# EAGLE board LCD-Backpack-PIC18F24J50-HD44780-v1a (EAGLE 5.06)
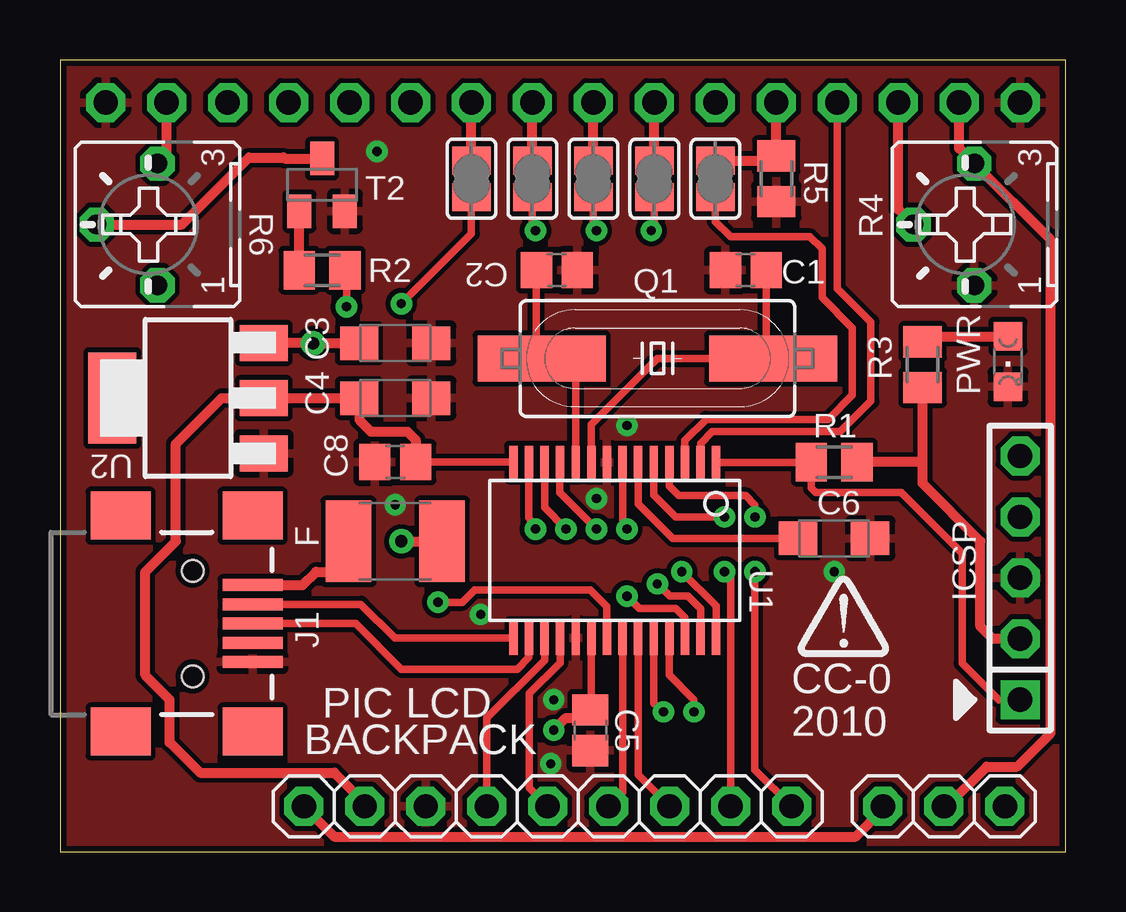
[diagram p0: board, top side]
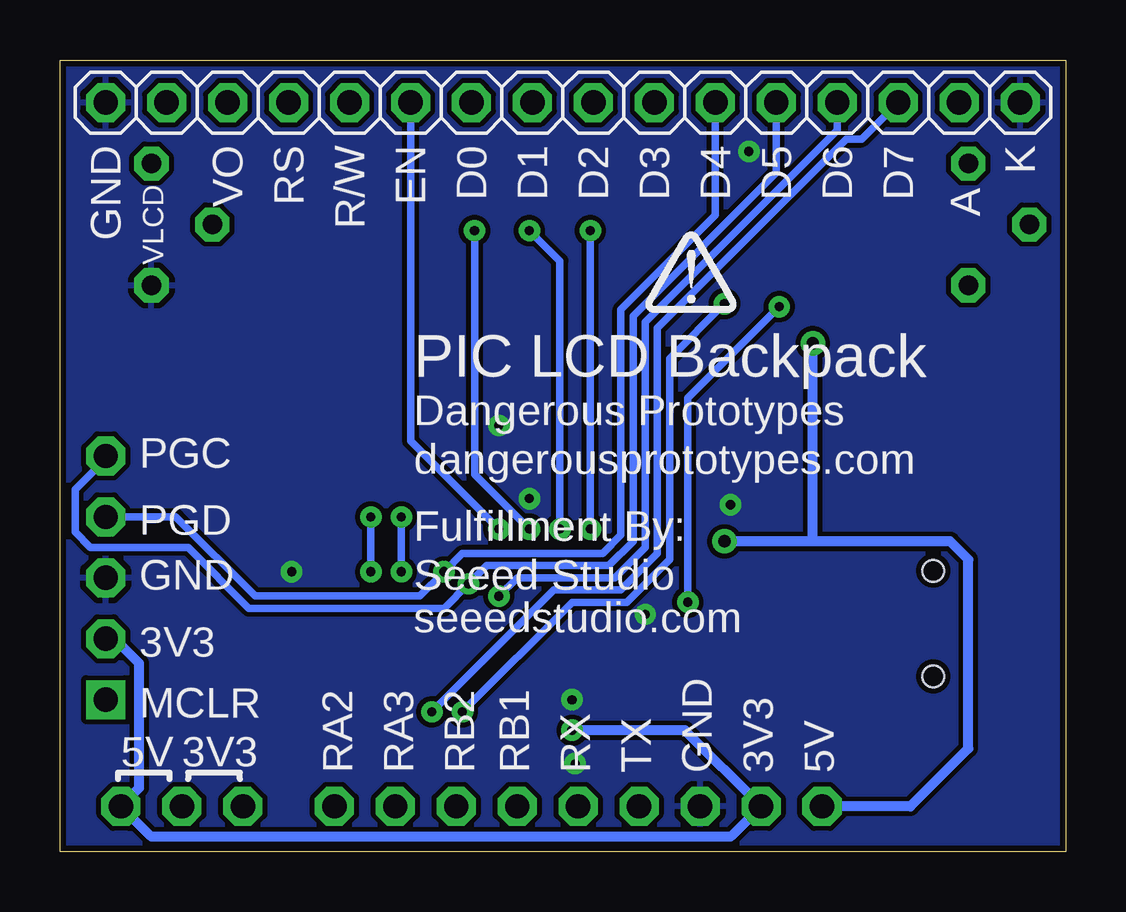
[diagram p1: board, bottom side, seen from below]

Size 41.91 x 33.02 mm. Coordinates in mm from the lower left corner, seen from the top.
Outline: 41.91,33.02 0,33.02 0,0 41.91,0 41.91,33.02
Copper layers (1*16): Top 0.035mm / dielectric 1.5mm / Bottom 0.035mm
Design rules "SparkFun *": minimum track width 8mil, minimum drill 15mil, track to track 8mil, track to pad 8mil, pad to pad 8mil, via to via 8mil, smd to smd 8mil, copper to edge 10mil, drill to drill 8mil, minimum pad ring 12mil, minimum via ring 10mil, stop-mask expansion 4mil, vias tented up to drill 25mil, thermal gap 10mil

## Footprints (pad centres in the part's own frame; a part is rotated, then mirrored left to right if it is on the bottom)
C0805 = smd 1.3 x 1.5: 1 -0.85,0; 2 0.85,0
SMC_A = smd 1.6 x 1.4: + -1.5,0; - 1.5,0
RCL_L1812 = smd 1.9 x 3.4: 1 -1.95,0; 2 1.95,0
1X05 = drill 1.016 square: 1 -5.08,0 | drill 1.016 octagon: 2 -2.54,0; 3 0,0; 4 2.54,0; 5 5.08,0
USB-MINIB = smd 2.5 x 0.5: D+ 2.5,0; D- 2.5,0.8; GND 2.5,-1.6; ID 2.5,-0.8; VBUS 2.5,1.6 | smd 2.5 x 2: GND@1 -3,-4.5; GND@2 -3,4.5; GND@3 2.5,4.5; GND@4 2.5,-4.5 | hole 0.9: 0,2.2; 0,-2.2
1X09 = drill 1.016 octagon: 1 -10.16,0; 2 -7.62,0; 3 -5.08,0; 4 -2.54,0; 5 0,0; 6 2.54,0; 7 5.08,0; 8 7.62,0; 9 10.16,0
1X16 = drill 1.016 octagon: 1 -19.05,0; 2 -16.51,0; 3 -13.97,0; 4 -11.43,0; 5 -8.89,0; 6 -6.35,0; 7 -3.81,0; 8 -1.27,0; 9 1.27,0; 10 3.81,0; 11 6.35,0; 12 8.89,0; 13 11.43,0; 14 13.97,0; 15 16.51,0; 16 19.05,0
LED-805 = smd 1.2 x 1.2: A 0,-1.05; C 0,1.05
HC49UP = smd 5.334 x 1.93: 1 -4.826,0; 2 4.826,0
M0805 = smd 1.3 x 1.6: 1 -0.95,0; 2 0.95,0
B25P = drill 0.813 octagon: A -2.54,0; E 2.54,0; S 0,2.54
1X03 = drill 1.016 octagon: 1 -2.54,0; 2 0,0; 3 2.54,0
SJ = smd 1.168 x 1.6: 1 -0.762,0; 2 0.762,0
SOT23-BEC = smd 1 x 1.4: B -0.95,-1.1; C 0,1.1; E 0.95,-1.1
SSOP28 = smd 0.348 x 1.397: 1 -4.225,-3.656; 2 -3.575,-3.656; 3 -2.925,-3.656; 4 -2.275,-3.656; 5 -1.625,-3.656; 6 -0.975,-3.656; 7 -0.325,-3.656; 8 0.325,-3.656; 9 0.975,-3.656; 10 1.625,-3.656; 11 2.275,-3.656; 12 2.925,-3.656; 13 3.575,-3.656; 14 4.225,-3.656; 15 4.225,3.656; 16 3.575,3.656; 17 2.925,3.656; 18 2.275,3.656; 19 1.625,3.656; 20 0.975,3.656; 21 0.325,3.656; 22 -0.325,3.656; 23 -0.975,3.656; 24 -1.625,3.656; 25 -2.275,3.656; 26 -2.925,3.656; 27 -3.575,3.656; 28 -4.225,3.656
SOT223 = smd 1.5 x 2: 1 -2.3,-3.15; 2 0,-3.15; 3 2.3,-3.15 | smd 3.8 x 2: 4 0,3.15
LCD-16X2 = drill 1.016 square: 1 -32,15.5 | drill 1.016 round: 2 -29.46,15.5; 3 -26.92,15.5; 4 -24.38,15.5; 5 -21.84,15.5; 6 -19.3,15.5; 7 -16.76,15.5; 8 -14.22,15.5; 9 -11.68,15.5; 10 -9.14,15.5; 11 -6.6,15.5; 12 -4.06,15.5; 13 -1.52,15.5; 14 1.02,15.5; 15 3.56,15.5; 16 6.1,15.5 | hole 2.8: -37.5,15.5; -37.5,-15.5; 37.5,15.5; 37.5,-15.5

## Placement (x,y rotation side)
C1  27pf  [C0805]  28.57,24.26 180 top
C2  27pf  [C0805]  20.7,24.26 0 top
C3  10uF  [SMC_A]  13.97,21.21 0 top
C4  1uF  [SMC_A]  13.97,18.92 0 top
C5  0.1uF  [C0805]  22.1,5.08 270 top
C6  10uF  [SMC_A]  32.26,13.08 0 top
C8  0.1uF  [C0805]  13.97,16.26 180 top
F  500mA  [RCL_L1812]  13.97,12.95 180 top
ICSP  [1X05]  40.01,11.43 90 top
J1  USBSMD  [USB-MINIB]  5.52,9.53 0 top
JP1  [1X09]  20.32,1.91 0 top
LCD  [1X16]  20.95,31.24 0 bottom
PWR  [LED-805]  39.5,20.45 180 top
Q1  [HC49UP]  24.89,20.57 180 top
R1  10K  [M0805]  32.26,16.26 0 top
R2  1K  [M0805]  10.92,24.26 0 top
R3  470  [M0805]  35.94,20.32 270 top
R4  [B25P]  38.1,26.16 90 top
R5  10K  [M0805]  29.84,28.07 270 top
R6  [B25P]  4.06,26.16 90 top
SEL  [1X03]  36.83,1.91 0 top
SJ1  [SJ]  27.3,28.07 90 top
SJ2  [SJ]  24.77,28.07 90 top
SJ3  [SJ]  22.23,28.07 90 top
SJ4  [SJ]  19.68,28.07 90 top
SJ5  [SJ]  17.14,28.07 90 top
T2  [SOT23-BEC]  10.92,27.81 0 top
U1  PIC18F24J50  [SSOP28]  23.11,12.57 180 top
U2  [SOT223]  5.33,18.92 90 top
U$1  [DP_LOGO]  32.64,8.76 0 top
U$2  [DP_LOGO]  15.62,23.11 0 bottom
U$3  LCD-16X2  [LCD-16X2]  86.74,16.26 0 top  (outside the outline)

## Library data of the parts
C1 C2 C5 C8 R1 R3 R5 = resistor
C3 C4 PWR T2 U2 U$1 U$2 = dp_devices
C6 R2 = rcl
F = arduino_Uno_ref
ICSP = pinhead-2
J1 U$3 = SparkFun
JP1 SEL = pinhead - Copy
LCD = pinhead
Q1 = crystal
R4 R6 = pot
SJ1-SJ5 = jumper
U1 = dp_devices; PIC18FJ2X50: PIC18FJ2X50

## Nets
3V3: C4.+ C5.1 C8.1 ICSP.2 JP1.2 R1.2 R3.2 SEL.3 U1.14 U1.20 U2.2
A: U$3.15
BASE: R2.1 T2.B
BL+: LCD.15 R6.E
GND: C1.2 C2.2 C3.- C4.- C5.2 C6.- C8.2 ICSP.3 J1.GND JP1.3 LCD.1 LCD.16 PWR.C R4.A R5.2 T2.E U1.8 U1.19 U2.1
K: U$3.16
MCLR: ICSP.1 R1.1 U1.1
N$1: LCD.7 SJ2.2
N$2: LCD.8 SJ3.2
N$3: LCD.9 SJ4.2
N$4: C2.1 Q1.2 U1.10
N$5: C1.1 Q1.1 U1.9
N$6: R6.S T2.C
N$7: J1.D+ U1.16
N$8: J1.D- U1.15
N$9: LCD.10 SJ5.2
N$10: LCD.5 R5.1 SJ1.2
N$11: F.2 J1.VBUS
N$20: PWR.A R3.1
PGC: ICSP.5 LCD.12 U1.27
PGD: ICSP.4 LCD.11 U1.28
RA0: LCD.4 U1.2
RA1: SJ1.1 U1.3
RA2: JP1.9 U1.4
RA3: JP1.8 U1.5
RA5: LCD.6 U1.7
RB0: R2.2 U1.21
RB1: JP1.6 U1.22
RB2: JP1.7 U1.23
RB3: SJ5.1 U1.24
RB4: LCD.14 U1.25
RB5: LCD.13 U1.26
RC0: SJ2.1 U1.11
RC1: SJ3.1 U1.12
RC2: SJ4.1 U1.13
RX: JP1.5 U1.18
TX: JP1.4 U1.17
VDD: U$3.2
VDDCORE/VCAP: C6.+ U1.6
VLCD: LCD.2 R4.E SEL.2
VO: LCD.3 R4.S
VSS: U$3.1
VUSB: C3.+ F.1 JP1.1 SEL.1 U2.3

## Tracks (layer width: path | path; a pad name or v marks a point on that pad's centre or on a via)
3V3  (via drill 0.38)
  Top 0.305: C8.1 18.86,16.26 U1.14 | U1.20 22.14,6.1 C5.1 22.1,5.59
  Top 0.406: 35.94,16.26 35.94,15.37 38.35,12.95 38.35,9.4 38.86,8.89 ICSP.2 | 35.94,16.26 R3.2 | 35.94,16.26 R1.2 | C8.1 14.82,17.18 14.48,17.53 12.95,17.53 12.47,18.01 C4.+ U2.2 6.73,18.92 4.83,17.02 4.83,12.95 3.56,11.68 3.56,7.37 4.57,6.35 4.57,4.57 5.84,3.3 11.43,3.3 12.7,2.03 JP1.2 | 22.1,5.59 21.08,5.59 v20.57,5.08
  Bottom 0.406: ICSP.2 39.62,8.89 38.61,7.87 38.61,2.67 SEL.3 38.1,0.64 13.97,0.64 JP1.2 15.88,5.08 v20.57,5.08
BASE
  Top 0.406: R2.1 T2.B
BL+
  Top 0.406: LCD.15 4.45,29.08 R6.E
GND  (via drill 0.38)
  other vias: 22.35,14.73 17.53,9.91 20.57,6.35 23.62,17.78 20.45,3.68 32.26,11.68 13.97,14.48 13.21,29.21
  pour Bottom: 41.91,0 41.91,33.02 0,33.02 0,0
  pour Top: 41.91,0 41.91,33.02 0,33.02 0,0
MCLR
  Top 0.305: U1.1 30.77,16.23 R1.1 31.31,15.17 31.5,14.99 35.05,14.99 37.59,12.45 37.59,7.87 39.12,6.35 ICSP.1
N$1
  Top 0.406: SJ2.2 LCD.7
N$2
  Top 0.406: SJ3.2 LCD.8
N$3
  Top 0.406: SJ4.2 LCD.9
N$4
  Top 0.305: C2.1 19.85,20.79 Q1.2 21.34,20.57 21.49,20.42 U1.10
N$5
  Top 0.305: C1.1 29.43,20.87 Q1.1 24.89,20.57 22.14,17.82 U1.9
N$6
  Top 0.406: T2.C 9.36,28.91 9.31,28.96 7.87,28.96 5.08,26.16 R6.S
N$7
  Top 0.305: J1.D+ 12.32,9.53 14.22,7.62 19.05,7.62 19.54,8.11 U1.16
N$8
  Top 0.305: J1.D- 12.54,10.32 13.94,8.92 U1.15
N$9
  Top 0.406: SJ5.2 LCD.10
N$10
  Top 0.406: LCD.5 R5.1 29.84,28.83 SJ1.2
N$11
  Top 0.406: J1.VBUS 10.11,11.12 10.67,11.68 11.68,11.68 11.94,11.94 11.94,12.87 F.2
N$20
  Top 0.406: PWR.A 36.17,21.5 R3.1
PGC  (via drill 0.38)
  Top 0.305: U1.27 26.69,10.14 26.16,10.67 25.4,10.67 v24.89,11.18
  Bottom 0.305: LCD.12 12.06,28.32 18.03,22.35 18.03,12.95 19.05,11.94 24.13,11.94 v24.89,11.18 25.91,10.16 34.04,10.16 36.58,12.7 40.64,12.7 41.27,13.34 41.27,15.11 40.01,16.38 ICSP.5
PGD  (via drill 0.38)
  Top 0.305: v25.91,11.68 27.34,10.25 U1.28
  Bottom 0.305: LCD.11 14.61,26.54 18.54,22.61 18.54,13.21 19.3,12.45 25.15,12.45 v25.91,11.68 26.92,10.67 33.78,10.67 37.08,13.97 ICSP.4
RA0
  Top 0.305: LCD.4 32.38,23.5 33.78,22.1 33.78,18.8 32.51,17.53 27.18,17.53 26.69,17.04 U1.2
RA1
  Top 0.305: SJ1.1 27.3,26.29 27.94,25.65 31.24,25.65 31.75,25.15 31.75,23.11 33.02,21.84 33.02,19.05 32,18.03 26.92,18.03 26.04,17.15 U1.3
RA2  (via drill 0.38)
  Top 0.305: v28.96,13.97 28.96,14.48 28.57,14.86 25.78,14.86 25.39,15.25 U1.4 | v28.96,11.68 28.96,3.43 JP1.9
  Bottom 0.305: v28.96,11.68 v28.96,13.97
RA3  (via drill 0.38)
  Top 0.305: v27.69,13.97 25.65,13.97 24.74,14.88 U1.5 | JP1.8 27.94,11.43 v27.69,11.68
  Bottom 0.305: v27.69,11.68 v27.69,13.97
RA5  (via drill 0.38)
  Top 0.305: U1.7 23.44,13.64 v23.62,13.46
  Bottom 0.305: LCD.6 27.3,17.14 v23.62,13.46
RB0  (via drill 0.38)
  Top 0.305: U1.21 22.79,10.23 22.1,10.92 17.27,10.92 16.76,10.41 v15.75,10.41 | v11.94,22.73 11.94,24.19 R2.2
  Bottom 0.305: v15.75,10.41 15.75,18.92 v11.94,22.73
RB1
  Top 0.305: U1.22 23.44,2.48 JP1.6
RB2
  Top 0.305: U1.23 24.09,3.22 JP1.7
RB3  (via drill 0.38)
  Top 0.305: U1.24 24.74,6.2 v25.15,5.84 | SJ5.1 17.14,25.78 v14.22,22.86
  Bottom 0.305: v14.22,22.86 16.51,20.57 16.51,12.19 18.29,10.41 20.57,10.41 v25.15,5.84
RB4  (via drill 0.38)
  Top 0.305: U1.25 25.39,7.38 26.42,6.35 v26.42,5.84
  Bottom 0.305: LCD.14 8.51,29.72 9.14,29.72 17.02,21.84 17.02,12.45 18.54,10.92 21.34,10.92 v26.42,5.84
RB5  (via drill 0.38)
  Top 0.305: U1.26 26.04,9.78 25.65,10.16 24.13,10.16 v23.62,10.67
  Bottom 0.305: LCD.13 9.53,30.1 17.53,22.1 17.53,12.7 18.8,11.43 22.86,11.43 v23.62,10.67
RC0  (via drill 0.38)
  Top 0.305: SJ2.1 24.77,26.04 v24.64,25.91 | U1.11 20.83,16.22 20.83,14.99 v22.35,13.46
  Bottom 0.305: v24.64,25.91 24.64,15.75 v22.35,13.46
RC1  (via drill 0.38)
  Top 0.305: SJ3.1 22.23,26.04 v22.35,25.91 | U1.12 20.19,14.36 v21.08,13.46
  Bottom 0.305: v21.08,13.46 21.08,24.64 v22.35,25.91
RC2  (via drill 0.38)
  Top 0.305: SJ4.1 19.68,26.04 v19.81,25.91 | v19.81,13.46 19.54,13.95 U1.13
  Bottom 0.305: v19.81,13.46 v19.81,25.91
RX
  Top 0.305: U1.18 20.84,7.88 19.56,6.6 19.56,2.67 JP1.5
TX
  Top 0.305: U1.17 20.19,8 17.78,5.59 JP1.4
VDDCORE/VCAP
  Top 0.305: U1.6 24.09,14.52 25.53,13.08 C6.+
VLCD
  Top 0.406: LCD.2 37.47,29.34 R4.E 41.27,25.53 41.27,4.95 39.88,3.56 38.61,3.56 36.96,1.91 SEL.2
VO
  Top 0.406: LCD.3 34.92,26.8 R4.S
VUSB  (via drill 0.51)
  Top 0.406: 12.46,21.22 C3.+ v10.54,21.21 10.53,21.22 U2.3 | v14.22,12.95 F.1 | SEL.1 34.29,1.78 33.15,0.64 11.43,0.64 JP1.1
  Bottom 0.406: JP1.1 6.48,1.91 4.06,4.32 4.06,12.19 4.83,12.95 10.67,12.95 | 10.67,12.95 v14.22,12.95 | v10.54,21.21 10.54,13.08 10.67,12.95

## Text on the board
tNames: CC-0 | PIC LCD | 2010 | BACKPACK
bNames: K | D7 | D6 | D5 | D4 | D3 | D2 | D1 | D0 | EN | R/W | RS | VO | GND | A | VLCD | PIC LCD Backpack | Dangerous Prototypes | dangerousprototypes.com | PGC | Fulfillment By: | PGD | Seeed Studio | GND | seeedstudio.com | 3V3 | MCLR | 3V3 | 5V | 5V | 3V3 | GND | TX | RX | RB1 | RB2 | RA3 | RA2